# Altium PCB investigator_control_board.PcbDoc
Units mil, origin at the board's own origin, x right, y up, seen from the top; angles counter-clockwise.
Board outline 1250 x 2000 mil, 2 copper layers (Top Layer, Bottom Layer); 19 components, 37 nets, 110 pads, 5 vias.
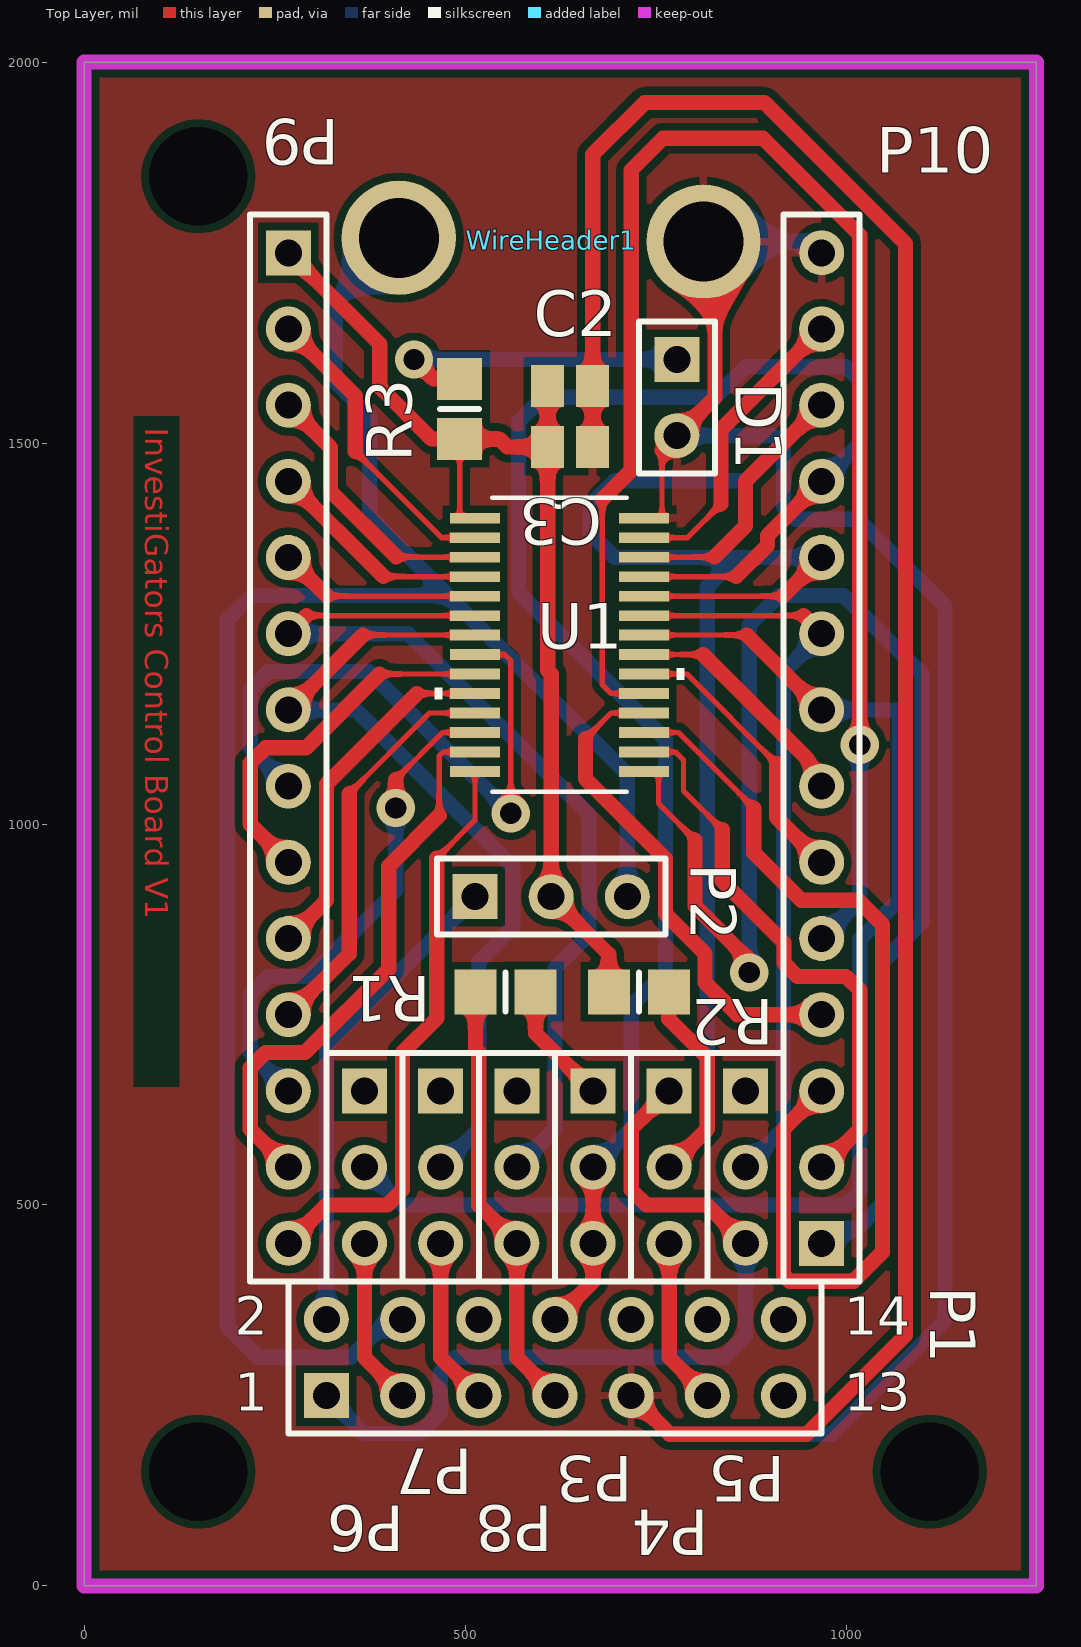
[diagram p0: Top Layer view]
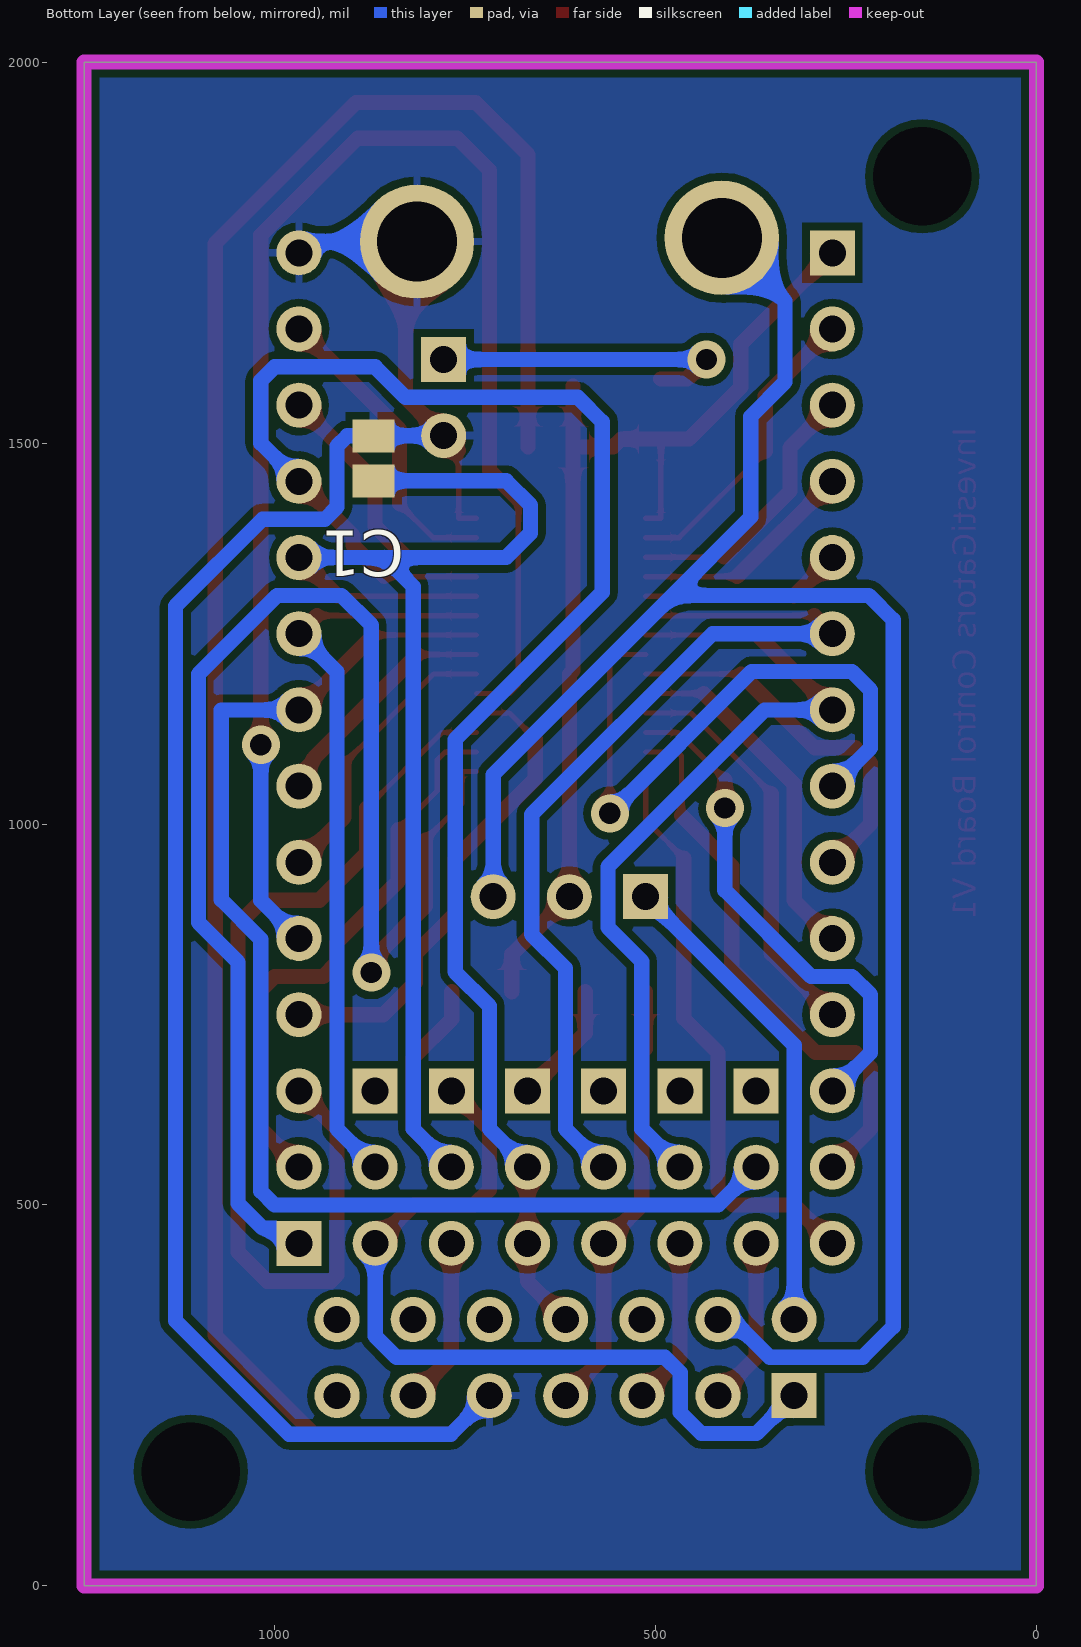
[diagram p1: Bottom Layer view, seen from below]

## Layer stack, top to bottom
Top Solder: solder mask 0.4, Solder Resist, Dk 3.5
Top Layer: signal copper 1.4
Dielectric1: dielectric 12.6, FR-4, Dk 4.8
Bottom Layer: signal copper 1.4
Bottom Solder: solder mask 0.4, Solder Resist, Dk 3.5

## Board outline
0,0 0,2000 1250,2000 1250,0

## Design rules (kind name [scope] priority, off if disabled: settings)
Clearance [All] p1: gap=10
PolygonConnect [All] p1: connectstyle=Relief reliefconductorwidth=10 reliefentries=4 polygonreliefangle="90 Angle" airgapwidth=10
RoutingVias [All] p1: holewidth=28 width=50 viastyle="Through Hole" minholewidth=28 minwidth=50 maxholewidth=28 maxwidth=50
SMDNeckDown MSP430_NECKDOWN [All] p1: percent=50.000
SolderMaskExpansion [All] p1: expansion=4
Width MAIN_WIDTH [All] p1: maxlimit=20 minlimit=5 preferedwidth=20 minimp=50.000000 maximp=50.000000 favimp=50.000000
30 further rules are at their usual default settings.

## Components (designator, comment, footprint, x,y, rotation, side; value= is the part's Value field where it differs from the comment)
C1 "Cap" C0805 870,1480 r270 bottom
C2 "Cap Pol3" C0805 638,1574.72 r0 top
C3 "Cap" C0805 638,1494.72 r180 top
D1 "LED0" HDR1X2 778,1609.72 r270 top
P1 "Header 7X2" HDR2X7 318,249.72 r0 top
P2 "Power Select" HDR1X3 513,904.72 r0 top
P3 "TEST" HDR1X3 668,649.72 r270 top
P4 "RST" HDR1X3 768,649.72 r270 top
P5 "TDO" HDR1X3 868,649.72 r270 top
P6 "TDI" HDR1X3 368,649.72 r270 top
P7 "TMS" HDR1X3 468,649.72 r270 top
P8 "TCK" HDR1X3 568,649.72 r270 top
P9 "Header 14" HDR1X14 268,1749.72 r270 top
P10 "Header 14" HDR1X14 968,449.72 r90 top
R1 "Res3" 6-0805_M 553,779.72 r180 top
R2 "Res3" 6-0805_M 728,779.72 r180 top
R3 "Res3" 6-0805_M 493,1544.72 r270 top
U1 "MSP430G2553_PW_2" PW28 624,1235.16 r0 top
WireHeader1 "14 Gauge WIre" WireHeader 813,1764.41 r180 top

## Footprints (in the part's own frame and the unit in brackets; to place one, negate y for a bottom-side part, rotate by r counter-clockwise, add the part's x,y. Pads: shape width x height; smd on the part's side, far side on the other; paste and mask are expansions set on the pad)
6-0805_M [mm] "Chip Resistor, Body 2.0x1.2mm, IPC Low Density"
  rect 1.4x1.5 smd: 1(-1,0) 2(1,0)
  silkscreen extent 0,-0.65 0,0.65, body extent -1.07,-0.7 1.07,0.7, height 0.7
C0805 [mm] "Chip Capacitor, Body 2.0x1.3mm, IPC High Density"
  rect 1.1x1.4 smd: 1(-0.75,0) 2(0.75,0)
  body extent -1.1,-0.72 1.1,0.72, height 1.4
HDR1X2 [mm] "Connector; Header; 2 Position"
  rect 1.5x1.5 hole 0.9: 1(0,0)
  round 1.5 hole 0.9: 2(2.54,0)
  silkscreen extent -1.27,-1.27 3.81,1.27
HDR1X3 [mm] "Connector; Header; 3 Position"
  rect 1.5x1.5 hole 0.9: 1(0,0)
  round 1.5 hole 0.9: 2(2.54,0) 3(5.08,0)
  silkscreen extent -1.27,-1.27 6.35,1.27
HDR1X14 [mm] "Connector; Header; 14 Position"
  rect 1.5x1.5 hole 0.9: 1(0,0)
  round 1.5 hole 0.9: 2(2.54,0) 3(5.08,0) 4(7.62,0) 5(10.16,0) 6(12.7,0) 7(15.24,0) 8(17.78,0) 9(20.32,0) 10(22.86,0) 11(25.4,0) 12(27.94,0) 13(30.48,0) 14(33.02,0)
  silkscreen extent -1.27,-1.27 34.29,1.27
HDR2X7 [mm] "Connector; Header; 7x2 Position"
  rect 1.5x1.5 hole 0.9: 1(0,0)
  round 1.5 hole 0.9: 2(0,2.54) 3(2.54,0) 4(2.54,2.54) 5(5.08,0) 6(5.08,2.54) 7(7.62,0) 8(7.62,2.54) 9(10.16,0) 10(10.16,2.54) 11(12.7,0) 12(12.7,2.54) 13(15.24,0) 14(15.24,2.54)
  silkscreen extent -1.27,-1.27 16.51,3.81
PW28 [mil]
  rect 66x14 smd: 1(-111,166.34) 2(-111,140.75) 3(-111,115.16) 4(-111,89.57) 5(-111,63.98) 6(-111,38.39) 7(-111,12.8) 8(-111,-12.8) 9(-111,-38.39) 10(-111,-63.98) 11(-111,-89.57) 12(-111,-115.16) 13(-111,-140.75) 14(-111,-166.34) 15(111,-166.34) 16(111,-140.75) 17(111,-115.16) 18(111,-89.57) 19(111,-63.98) 20(111,-38.39) 21(111,-12.8) 22(111,12.8) 23(111,38.39) 24(111,63.98) 25(111,89.57) 26(111,115.16) 27(111,140.75) 28(111,166.34)
  silkscreen extent -164,-193 164,193
WireHeader [mil]
  round 150 hole 105: 1(0,0) 2(400,-5)

## Part data
C1 C3: "Capacitor"
C2: "Polarized Capacitor (Surface Mount)"
D1: "Typical INFRARED GaAs LED"
P1: "Header, 7-Pin, Dual row"
P2 P3 P4 P5 P6 P7 P8: library part "Header 3", "Header, 3-Pin"
P9 P10: "Header, 14-Pin"
R1 R2 R3: "Resistor"
U1: "Imported"
WireHeader1: library part WireHeader

## Free pads (board coordinates)
  round 0 hole 129: 1(150,150) 2(1110,150) 3(150,1850)

## Via types
v1: diameter 50, hole 28, Top Layer to Bottom Layer, 5 vias

## Nets (pads, with @x,y where several pads share a name; then routed paths per layer and width w, separated by ;. In a path a pad name is that pad's centre, name@x,y a point inside that pad or via, vN(x,y) a via of type N, cw(c..) or ccw(c..) an arc to the next point about the centre after c; other vN are vias at no path point)
GND: C1.1 C2.2 C3.1 D1.2 P1.9 P10.14 U1.28 WireHeader1.1 | length 5282.7
  Top Layer w7: U1.28 758.47,1401.5 D1.2@758.47,1490.2
  Top Layer w20: C3.1 C2.2 667.53,1878.53 736,1947 893,1947 1078,1762 1078,329 948,199 768.72,199 P1.9 ; D1.2@758.47,1490.2 D1.2 828,1559.72 828,1719 813,1719 WireHeader1.1
  Bottom Layer w20: P1.9 768.72,199 981,199 1130,348 1130,1286 1016,1400 934,1400 918,1416 918,1496 904.47,1509.53 C1.1 823.2,1509.53 823,1509.72 D1.2 ; WireHeader1.1 953.31,1764.41 P10.14
NetD1_1: D1.1 R3.1 | length 415.6
  Top Layer w20: v1(433,1609.72) 458.63,1584.09 R3.1
  Bottom Layer w20: v1(433,1609.72) D1.1
NetP1_2: P1.2 P2.1 | length 635.8
  Bottom Layer w20: P1.2 318,709.72 P2.1
NetP3_1: P3.1 R1.1 | length 161.3
  Top Layer w20: R1.1 592.37,725.35 P3.1
NetP9_8: P9.8 U1.8 | length 826.6
  Top Layer w7: U1.8 552,1222.36 560,1214.36 v1(560,1014)
  Bottom Layer w20: P9.8 218,1099.72 218,1176 242,1200 374,1200 v1(560,1014)
NetP9_9: P9.9 U1.9 | length 494.4
  Top Layer w7: 387.77,1196.77 U1.9
  Top Layer w20: P9.9 218,999.72 218,1080 238,1100 291,1100 387.77,1196.77
NetP9_10: P9.10 U1.10 | length 467.6
  Top Layer w7: 436.75,1171.18 U1.10
  Top Layer w20: P9.10 318,899.72 318,1052.43 436.75,1171.18
NetP9_11: P9.11 U1.11 | length 532.2
  Top Layer w7: 348,1040 453.59,1145.59 U1.11
  Top Layer w20: P9.11 348,829.72 348,1040
NetP9_12: P9.12 U1.12 | length 669.8
  Top Layer w7: 409,1058.57 470.43,1120 U1.12
  Top Layer w20: v1(409,1021) 409,1058.57
  Bottom Layer w20: P9.12 218,699.72 218,776 242,800 296,800 409,913 v1(409,1021)
NetP9_13: P9.13 U1.13 | length 742.4
  Top Layer w7: 466,1011 466,1089 471.41,1094.41 U1.13
  Top Layer w20: P9.13 218,599.72 218,680 238,700 290,700 400,810 400,945 466,1011
NetP9_14: P9.14 U1.14 | length 767.3
  Top Layer w7: 463,955 513,1005 U1.14
  Top Layer w20: P9.14 318.28,500 398,500 418,520 418,700 463,745 463,955
NetP10_1: P10.1 U1.15 | length 1887.7
  Top Layer w7: U1.15 754,1068.82 754,1026.9 801.89,979.01
  Top Layer w20: 801.89,979.01 801.89,892.11 873,821 v1(873,805)
  Bottom Layer w20: v1(873,805) 873,1261 912,1300 996.78,1300 1100,1196.78 1100,870.66 1048,818.66 1048,502 1016,470 P10.1
NetP10_2: P10.2 U1.16 | length 744.1
  Top Layer w7: U1.16 776,1094.41 786.66,1083.75 786.66,1043.47 837.6,992.53
  Top Layer w20: 837.6,992.53 837.6,925.12 918.57,844.15 918.57,817.43 936,800 1000,800 1018,782 1018,599.72 P10.2
NetP10_3: P10.3 U1.17 | length 1293.4
  Top Layer w7: U1.17 780,1120 879,1021
  Top Layer w20: 879,1021 879,962 941,900 1016,900 1048,868 1048,438 1010,400 926,400 918,408 918,599.72 P10.3
NetP10_4: P10.4 U1.18 | length 646.5
  Top Layer w7: 658,1112 691.59,1145.59 U1.18
  Top Layer w20: 658,1112 658,1059.25 763,954.25 763,882 815,830 815,792 857.28,749.72 P10.4
NetP10_5: P10.5 U1.19 | length 2064.6
  Top Layer w7: 680,1426 680,1183 691.82,1171.18 U1.19
  Top Layer w20: 680,1426 718,1464 718,1858 760,1900 891,1900 1018,1773 v1(1018,1104)
  Bottom Layer w20: P10.5 1018,899.72 v1(1018,1104)
NetP10_6: P10.6 U1.20 | length 376.5
  Top Layer w7: U1.20 791.23,1196.77 909,1079
  Top Layer w20: 909,1079 909,1008.72 P10.6
NetP10_7: P10.7 U1.21 | length 311.2
  Top Layer w7: U1.21 812.35,1222.36
  Top Layer w20: 812.35,1222.36 948.16,1086.54 P10.7
P1.0: P9.2 U1.2 | length 401.1
  Top Layer w7: 356,1488.91 469,1375.91 U1.2
  Top Layer w20: P9.2 356,1561.72 356,1488.91
P1.1/TA0.0: P9.3 U1.3 | length 361.3
  Top Layer w7: 409.84,1350.32 U1.3
  Top Layer w20: P9.3 323.41,1494.32 323.41,1436.75 409.84,1350.32
P1.2/TA0.1: P9.4 U1.4 | length 296.8
  Top Layer w7: 393,1324.72 U1.4
  Top Layer w20: P9.4 393,1324.72
P1.3: P9.5 U1.5 | length 266
  Top Layer w7: 318.59,1299.13 U1.5
  Top Layer w20: P9.5 318.59,1299.13
P1.4/TCK: P8.2 P9.6 U1.6 | length 1249.6
  Top Layer w7: 291.82,1273.54 U1.6
  Top Layer w20: P9.6 291.82,1273.54
  Bottom Layer w20: P9.6 425.36,1249.72 662.53,1012.56 662.53,855.2 618,810.67 618,599.72 P8.2
P1.5/TMS: P7.2 P9.7 U1.7 | length 1098.9
  Top Layer w7: 366.23,1247.95 U1.7
  Top Layer w20: P9.7 366.23,1247.95
  Bottom Layer w20: P9.7 356.8,1149.72 562.53,944 562.53,864 518,819.47 518,599.72 P7.2
P1.6/TDI: P6.2 P10.8 U1.22 | length 1707
  Top Layer w7: U1.22 869.77,1247.95
  Top Layer w20: 869.77,1247.95 P10.8
  Bottom Layer w20: P6.2 417.72,500 1000,500 1018,518 1018,848.66 1070,900.66 1070,1149.72 P10.8
P1.7/TDO: P5.2 P10.9 U1.23 | length 984.3
  Top Layer w7: U1.23 944.18,1273.54
  Top Layer w20: 944.18,1273.54 P10.9
  Bottom Layer w20: P5.2 918,599.72 918,1199.72 P10.9
RST/NMI: P1.11 P4.3 | length 220.7
  Top Layer w20: P4.3 768,299.72 P1.11
RST/SBWTDIO: C1.2 P4.2 P10.10 R2.1 U1.24 | length 1935.3
  Top Layer w7: U1.24 917.41,1299.13
  Top Layer w20: R2.1 767.37,744 818,693.37 818,599.72 P4.2 ; 917.41,1299.13 P10.10
  Bottom Layer w20: P4.2 818,599.72 818,1311.72 856,1349.72 ; C1.2 696,1450.47 664,1418.47 664,1381.72 696,1349.72 856,1349.72 ; P10.10 856,1349.72
SBWTCK: P1.7 P8.3 R1.2 | length 573.2
  Top Layer w20: R1.2 513.63,704.57 518,700.2 518,499.72 P8.3 568,299.72 P1.7
TDI: P1.3 P6.3 | length 220.7
  Top Layer w20: P6.3 368,299.72 P1.3
TDO/SBWTDIO: P1.1 P4.1 P5.3 | length 1105.3
  Top Layer w20: P4.1 718,599.72 718,520 738,500 817.72,500 P5.3
  Bottom Layer w20: P1.1 367.53,200.2 440,200.2 467.53,227.72 467.53,280 487.53,300 840,300 868,328 P5.3
TEST/SBWTCK: P1.8 P3.2 P3.3 P10.11 U1.25 | length 2248.9
  Top Layer w7: U1.25 856,1324.72
  Top Layer w20: P1.8 668,399.72 P3.3 P3.2 ; 856,1324.72 897,1365.72 897,1378.72 P10.11
  Bottom Layer w20: P3.2 718,599.72 718,761 763,806 763,1111 570,1304 570,1528 602,1560 828,1560 868,1600 1000,1600 1018,1582 1018,1499.72 P10.11
TMS: P1.5 P7.3 | length 220.7
  Top Layer w20: P7.3 468,299.72 P1.5
VCC: C2.1 C3.2 P2.2 P9.1 R2.2 R3.2 U1.1 | length 1431.2
  Top Layer w7: R3.2 493,1401.5 U1.1
  Top Layer w20: P9.1 388,1629.72 388,1573.35 456,1505.35 R3.2 545,1505.35 555.63,1494.72 C3.2 ; C2.1 C3.2 ; R2.2 688.63,829.09 P2.2 613,1197 608.47,1201.53 C3.2
VCC_EXT: P1.4 P2.3 WireHeader1.2 | length 2555.6
  Bottom Layer w20: WireHeader1.2 330,1686.41 330,1580 375,1535 375,1402.77 477.77,1300 ; P1.4 399.72,349.72 350.2,300.2 228,300.2 188,340.2 188,1268 220,1300 477.77,1300 ; P2.3 713,1064.77 477.77,1300
XIN: P10.13 U1.27 | length 403.7
  Top Layer w7: U1.27 792,1375.91 836,1419.91
  Top Layer w20: 836,1419.91 836,1517.72 P10.13
XOUT: P10.12 U1.26 | length 350
  Top Layer w7: U1.26 827.32,1350.32
  Top Layer w20: 827.32,1350.32 868.23,1391.23 868.23,1449.96 P10.12
pads on no net: P1.6 P1.10 P1.12 P1.13 P1.14 P5.1 P6.1 P7.1 P8.1

## Polygon pours and split planes (outlines as drawn)
GND on Bottom Layer "BottomPlane" (solid, pour order 4): 1250,0 0,0 0,2000 1250,2000
GND on Top Layer "TopPlane" (solid, pour order 2): 0,2000 1250,2000 1250,0 0,0

## Keep-outs
Keep-Out Layer:
  the board outline again, w20

## Other copper
Top Layer:
  text "InvestiGators Control Board V1" at 80,1520 h30 r270

## Text inside footprints (layer, text, board x,y; h text height)
P1: Top Overlay "13" at 998,229.72 h50; Top Overlay "14" at 998,329.72 h50; Top Overlay "1" at 198,229.72 h50; Top Overlay "2" at 198,329.72 h50